# EAGLE board BNC Shield 0.1-0.8 SMD (EAGLE 6.4)
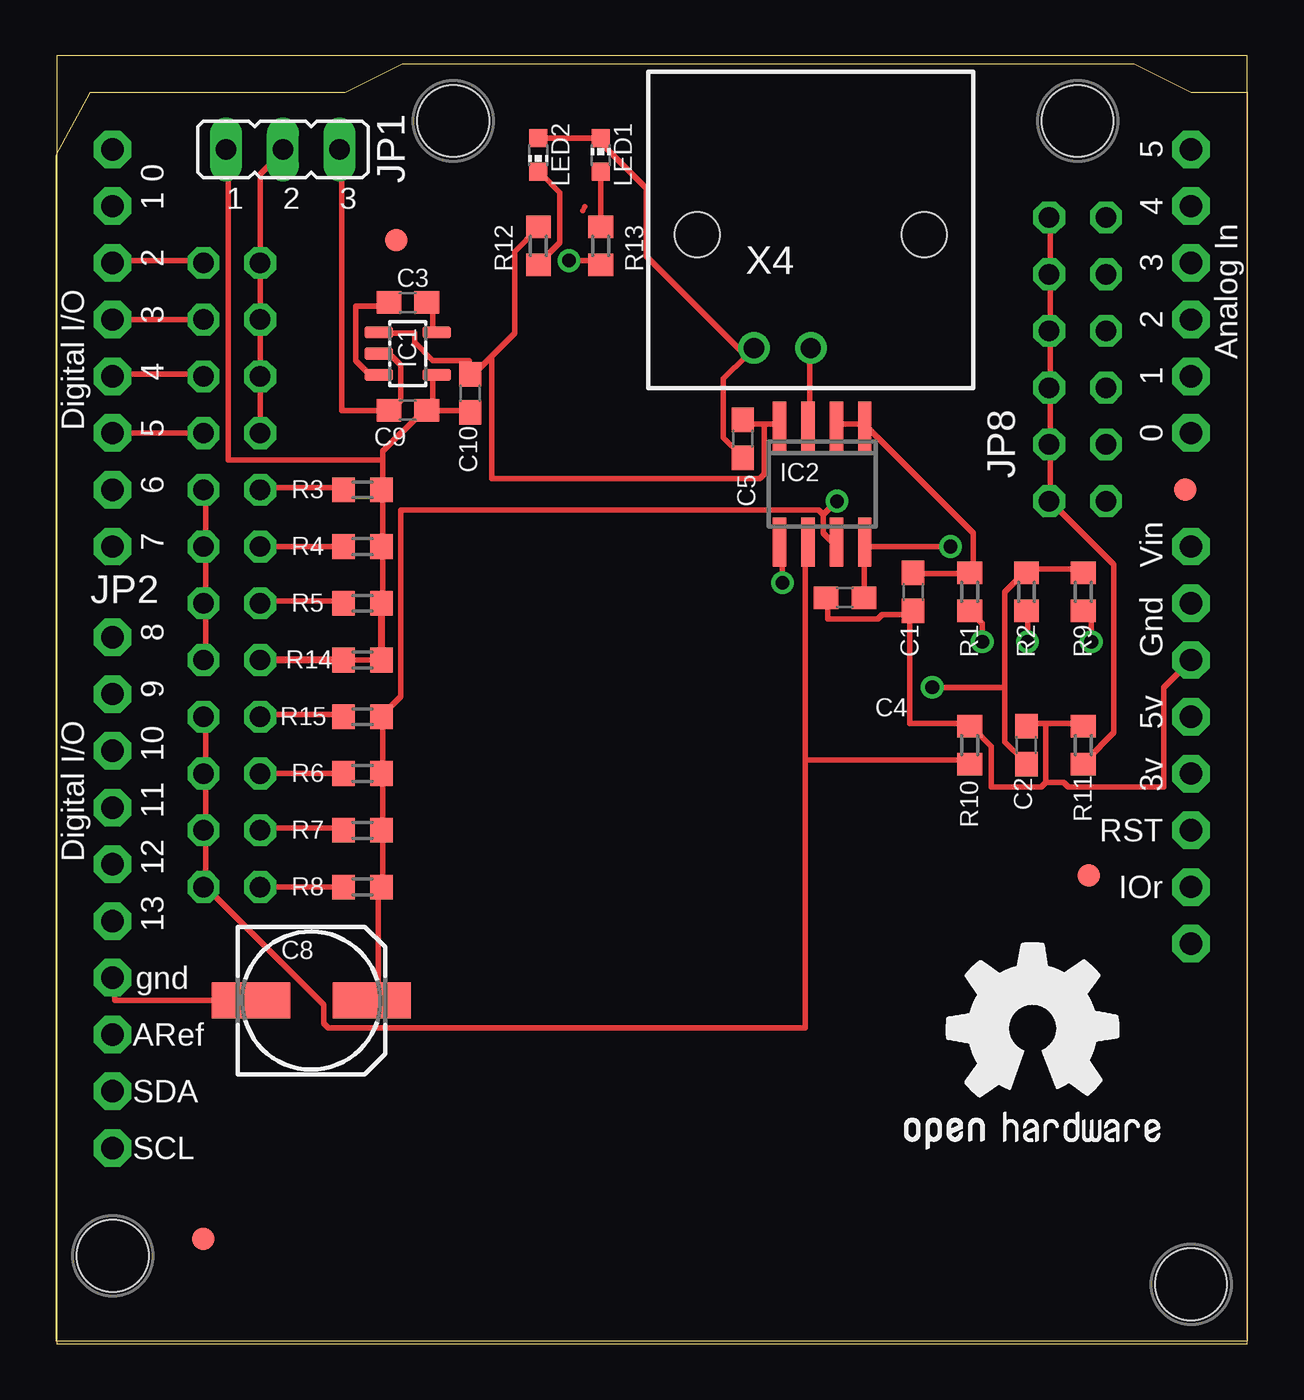
[diagram p0: board, top side]
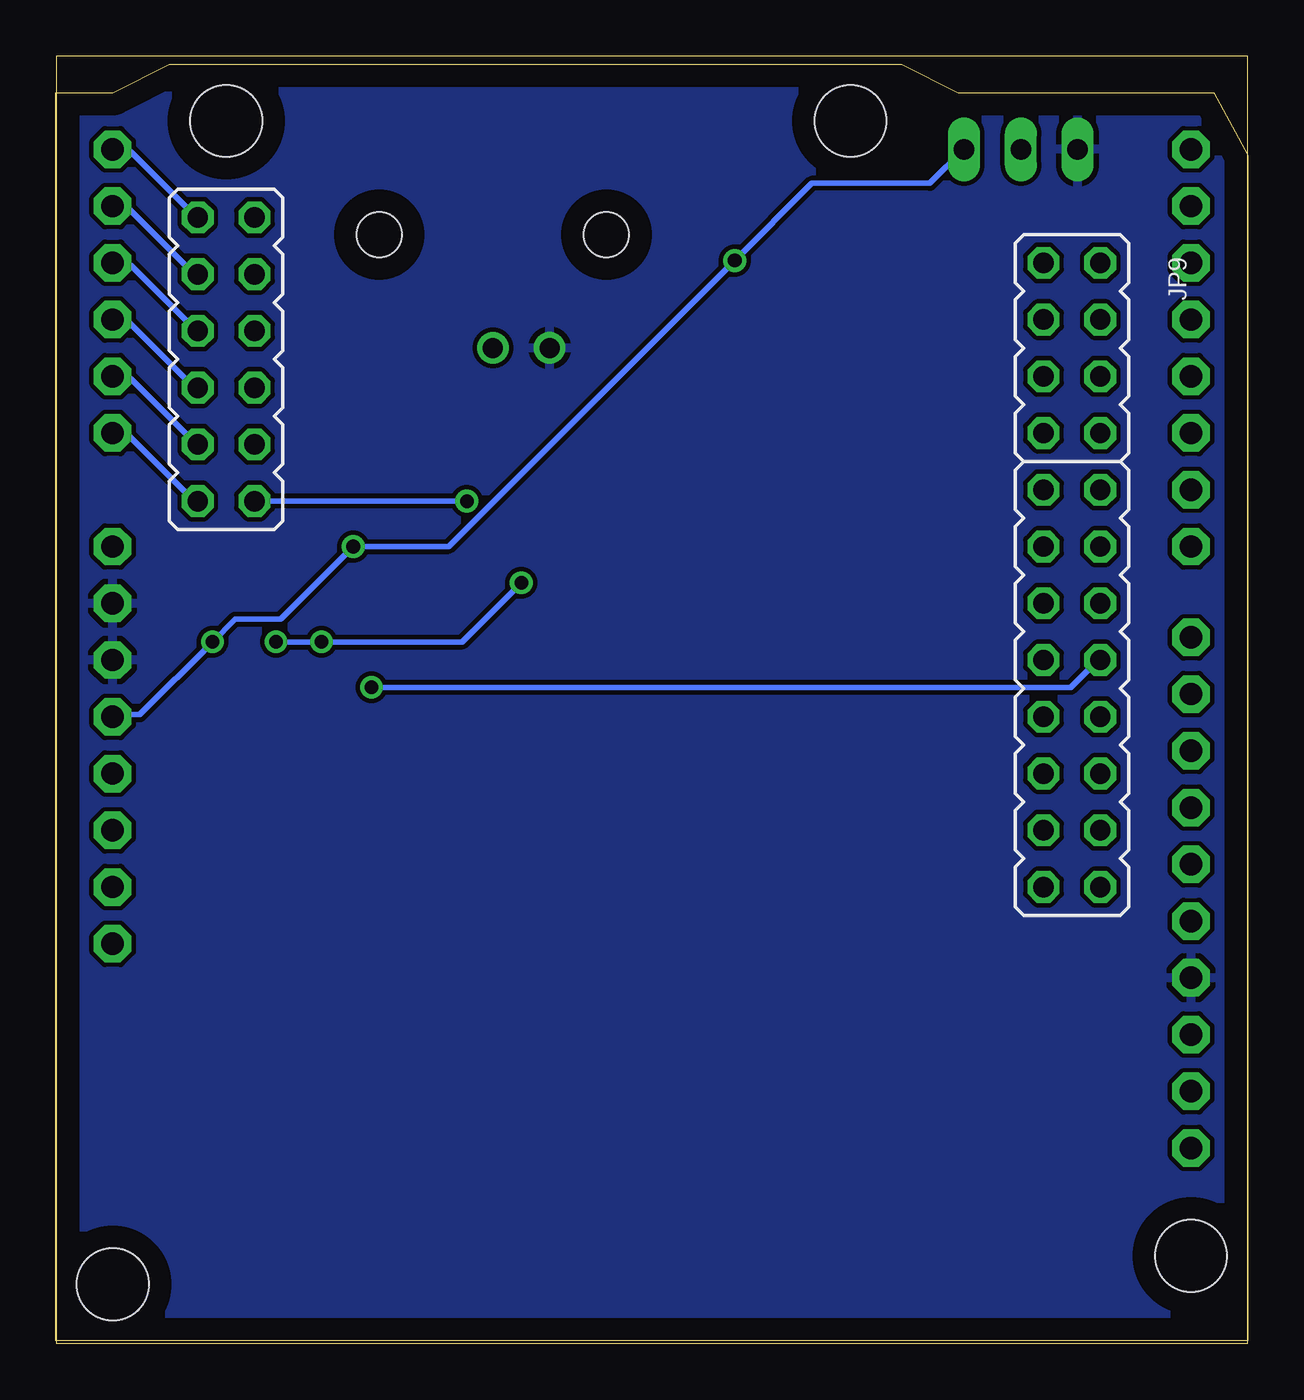
[diagram p1: board, bottom side, seen from below]

Size 53.34 x 57.65 mm. Coordinates in mm from the lower left corner, seen from the top.
Outline: 0.04,0 53.3,0 53.3,57.65 0.04,57.65 0.04,0
Copper layers (1*16): Top 0.035mm / dielectric 1.5mm / Bottom 0.035mm
Design rules "default": minimum track width 10mil, minimum drill 24mil, track to track 8mil, track to pad 8mil, pad to pad 8mil, via to via 8mil, smd to smd 8mil, copper to edge 40mil, drill to drill 8mil, minimum pad ring 10mil, minimum via ring 8mil, stop-mask expansion 4mil, vias tented up to drill 0mil, thermal gap 10mil
Holes 3.2 mm at 45.72,54.73 17.78,54.73 2.54,3.93 50.8,2.66

## Footprints (pad centres in the part's own frame; a part is rotated, then mirrored left to right if it is on the bottom)
C0603 = smd 1.1 x 1: 1 -0.85,0; 2 0.85,0
C603 = smd 1.1 x 1: 1 -0.85,0; 2 0.85,0
153CLV-0605 = smd 3.5 x 1.6: + 2.7,0; - -2.7,0
SOT23-DBV = smd 0.55 x 1.27: 1 -0.95,-1.3; 2 0,-1.3; 3 0.95,-1.3; 4 0.95,1.3; 5 -0.95,1.3
SO08 = smd 0.6 x 2.2: 1 -1.905,-2.6; 2 -0.635,-2.6; 3 0.635,-2.6; 4 1.905,-2.6; 5 1.905,2.6; 6 0.635,2.6; 7 -0.635,2.6; 8 -1.905,2.6
JP2 = drill 0.914 long: 1 -2.54,0; 2 0,0; 3 2.54,0
JP8Q = drill 0.914 octagon: 1 -8.89,-1.27; 2 -8.89,1.27; 3 -6.35,-1.27; 4 -6.35,1.27; 5 -3.81,-1.27; 6 -3.81,1.27; 7 -1.27,-1.27; 8 -1.27,1.27; 9 1.27,-1.27; 10 1.27,1.27; 11 3.81,-1.27; 12 3.81,1.27; 13 6.35,-1.27; 14 6.35,1.27; 15 8.89,-1.27; 16 8.89,1.27
JP6Q = drill 0.914 octagon: 1 -6.35,-1.27; 2 -6.35,1.27; 3 -3.81,-1.27; 4 -3.81,1.27; 5 -1.27,-1.27; 6 -1.27,1.27; 7 1.27,-1.27; 8 1.27,1.27; 9 3.81,-1.27; 10 3.81,1.27; 11 6.35,-1.27; 12 6.35,1.27
JP4Q = drill 0.914 octagon: 1 -3.81,-1.27; 2 -3.81,1.27; 3 -1.27,-1.27; 4 -1.27,1.27; 5 1.27,-1.27; 6 1.27,1.27; 7 3.81,-1.27; 8 3.81,1.27
CHIP-LED0603 = smd 0.8 x 0.8: A 0,-0.75; C 0,0.75
R0603 = smd 1 x 1.1: 1 -0.85,0; 2 0.85,0
ARDUINOR3 = drill 1 pad 1.676 octagon: 3V 25.4,2.54; 5V 27.94,2.54; A0 40.64,2.54; A1 43.18,2.54; A2 45.72,2.54; A3 48.26,2.54; A4 50.8,2.54; A5 53.34,2.54; AREF 13.716,50.8; D0 53.34,50.8; D1 50.8,50.8; D2 48.26,50.8; D3 45.72,50.8; D4 43.18,50.8; D5 40.64,50.8; D6 38.1,50.8; D7 35.56,50.8; D8 31.496,50.8; D9 28.956,50.8; D10 26.416,50.8; D11 23.876,50.8; D12 21.336,50.8; D13 18.796,50.8; GND 16.256,50.8; GND1 33.02,2.54; GND2 30.48,2.54; IOREF 20.32,2.54; RESERVED 17.78,2.54; RESET 22.86,2.54; SCL 8.636,50.8; SDA 11.176,50.8; VIN 35.56,2.54
FIDUCIAL_1MM = smd 1 x 1: 1 0,0
AMP_227161 = drill 0.9 pad 1.27: 1 0,-5.08; 2 -2.54,-5.08 | hole 2: -5.08,0; 5.08,0

## Placement (x,y rotation side)
C1  10uF  [C0603]  38.35,33.65 270 top
C2  10uF  [C0603]  43.43,26.79 90 top
C3  1u  [C603]  15.75,46.6 0 top
C4  0.1uf  [C603]  35.31,33.4 180 top
C5  0.1uf  [C603]  30.73,40.51 270 top
C8  100ufX6.3v  [153CLV-0605]  11.43,15.36 0 top
C9  1u  [C603]  15.75,41.78 0 top
C10  1u  [C603]  18.54,42.54 90 top
IC1  TPS60400DBV  [SOT23-DBV]  15.75,44.32 270 top
IC2  TL072D  [SO08]  34.29,38.48 180 top
JP1  [JP2]  10.16,53.46 0 top
JP2  [JP8Q]  7.87,29.33 270 bottom
JP8  [JP6Q]  45.72,44.06 90 bottom
JP9  [JP4Q]  7.87,44.57 90 bottom
LED1  [CHIP-LED0603]  24.38,53.21 0 top
LED2  [CHIP-LED0603]  21.59,53.21 180 top
R1  100k  [R0603]  40.89,33.65 270 top
R2  100k  [R0603]  43.43,33.65 270 top
R3  1.91k  [R0603]  13.72,38.22 180 top
R4  909  [R0603]  13.72,35.68 180 top
R5  400  [R0603]  13.72,33.14 180 top
R6  110k  [R0603]  13.72,25.52 180 top
R7  240k  [R0603]  13.72,22.98 180 top
R8  490k  [R0603]  13.72,20.44 180 top
R9  10K  [R0603]  45.97,33.65 90 top
R10  10k  [R0603]  40.89,26.79 270 top
R11  100k  [R0603]  45.97,26.79 270 top
R12  150  [R0603]  21.59,49.14 90 top
R13  150  [R0603]  24.38,49.14 90 top
R14  205  [R0603]  13.72,30.6 180 top
R15  51k  [R0603]  13.72,28.06 180 top
U1  ARDUINOR3-DIMENSION  [ARDUINOR3]  53.34,0.12 90 top
U$1  [OSHW1]  37.34,6.98 0 top
U$2  FIDUCIAL  [FIDUCIAL_1MM]  6.6,4.69 0 top
U$3  FIDUCIAL  [FIDUCIAL_1MM]  46.23,20.95 0 top
U$4  FIDUCIAL  [FIDUCIAL_1MM]  15.24,49.4 0 top
U$5  FIDUCIAL  [FIDUCIAL_1MM]  50.55,38.22 0 top
X4  1-227161-0  [AMP_227161]  33.78,49.65 0 top

## Library data of the parts
C1 C2 R1-R15 = resistor
C3-C5 C9 C10 = dp_devices
C8 LED1 LED2 U1 U$2-U$5 = adafruit
IC1 = SparkysWidgets
IC2 = linear
JP1 JP2 JP8 JP9 = jumper
U$1 = NBitWonder
X4 = con-coax

## Nets
3V: U1.3V
-5V: C5.1 C10.2 IC1.1 IC2.4 R12.2
GND: C1.2 C2.2 C4.2 C5.2 C8.- C9.2 C10.1 IC1.4 JP1.1 LED1.C LED2.A R3.1 R4.1 R5.1 R10.1 R11.1 R14.1 U1.GND U1.GND1 U1.GND2 X4.2
N$1: C1.1 IC2.1 IC2.2 R1.1
N$2: JP2.1 R3.2
N$3: JP2.3 R4.2
N$4: JP2.5 R5.2
N$5: IC2.5 R1.2 R2.2
N$6: C2.1 JP2.2 JP2.4 JP2.6 JP2.8 R2.1 R9.2
N$7: JP2.11 R6.2
N$8: JP2.13 R7.2
N$9: JP2.15 R8.2
N$10: JP9.1 U1.D5
N$11: IC2.6 JP2.10 JP2.12 JP2.14 JP2.16 R10.2
N$12: IC2.3 X4.1
N$13: JP8.2 U1.A0
N$14: JP8.4 U1.A1
N$15: JP8.6 U1.A2
N$16: JP8.8 U1.A3
N$17: JP9.3 U1.D4
N$18: LED2.C R12.1
N$19: LED1.A R13.2
N$21: JP8.10 U1.A4
N$22: C3.1 IC1.3
N$23: C3.2 IC1.5
N$24: JP9.5 U1.D3
N$25: JP9.7 U1.D2
N$26: JP8.12 U1.A5
N$27: JP2.7 R14.2
N$28: JP2.9 R15.2
ONEWIRE_DATA: JP1.2 JP9.2 JP9.4 JP9.6 JP9.8
TO_ARDUINO: C8.+ IC2.7 JP8.1 JP8.3 JP8.5 JP8.7 JP8.9 JP8.11 R6.1 R7.1 R8.1 R11.2 R15.1
VCC: C4.1 C9.1 IC1.2 IC2.8 JP1.3 R9.1 R13.1 U1.5V
VIN: U1.VIN

## Tracks (layer width: path | path; a pad name or v marks a point on that pad's centre or on a via)
-5V
  Top 0.254: 31.7,41.17 32.31,41.17 IC2.4 | 31.7,41.17 30.89,41.17 C5.1 | 19.51,44.22 20.52,45.23 20.52,48.89 21.54,49.91 R12.2 | 19.51,44.22 18.69,43.4 C10.2 18.49,43.4 18.49,44.01 16.87,44.01 16.05,44.83 16.05,45.23 14.63,45.23 IC1.1 | 31.7,41.17 31.7,38.93 31.5,38.73 19.51,38.73 19.51,44.22
GND
  Top 0.254: 44.3,27.76 45.92,27.76 R11.1 | 44.3,27.76 43.48,27.76 C2.2 | 38.2,32.63 36.98,32.63 36.78,32.43 34.54,32.43 34.54,33.24 C4.2 | 38.2,32.63 38.2,27.76 40.84,27.76 R10.1 41.05,27.55 41.86,26.74 41.86,24.91 44.09,24.91 44.3,25.12 | 38.2,32.63 C1.2 | 44.3,25.12 44.3,27.76 | 16.66,41.78 16.87,41.98 16.87,43.2 IC1.4 | 16.66,41.78 18.49,41.78 C10.1 | 16.66,41.78 C9.2 16.46,41.78 14.63,39.95 14.63,39.54 | 14.63,35.68 14.63,38.12 R3.1 14.63,38.32 14.63,39.54 | 13.01,30.6 R14.1 | 14.43,33.04 R5.1 14.63,33.24 14.63,35.68 | 14.63,35.68 R4.1 | LED2.A 21.74,53.97 LED1.C 24.38,53.77 26.42,51.73 26.42,48.69 30.89,44.22 | 30.89,44.22 X4.2 31.09,44.42 | 30.89,44.22 29.87,43.2 29.87,40.56 30.68,39.75 C5.2 | C8.- 2.64,15.36 2.64,16.38 U1.GND | 14.63,39.54 7.72,39.54 7.72,53.36 JP1.1 | 44.3,25.12 45.11,25.12 45.31,24.91 49.58,24.91 49.58,29.38 U1.GND2
  Top 0.305: 14.57,33.04 R14.1
  Top 0.406: 14.43,33.04 14.57,33.04
  pour Bottom: -2.29,59.05 55.12,59.05 55.12,-1.91 -3.3,-1.91 -3.3,57.27 -3.3,59.05 -2.54,59.05
N$1
  Top 0.254: C1.1 38.41,34.46 40.84,34.46 R1.1 41.05,34.67 41.05,36.29 36.37,40.97 IC2.1 36.17,41.17 34.95,41.17 IC2.2
N$2
  Top 0.254: R3.2 12.8,38.32 9.14,38.32 JP2.1
N$3
  Top 0.254: JP2.3 R4.2
N$4
  Top 0.254: R5.2 12.8,33.24 9.14,33.24 JP2.5
N$5  (via drill 0.61)
  Top 0.254: v41.45,31.41 41.45,32.23 41.05,32.63 R1.2 | v43.48,31.41 43.48,32.63 R2.2 | v32.51,34.06 32.51,35.68 IC2.5
  Bottom 0.254: v43.48,31.41 v41.45,31.41 35.15,31.41 v32.51,34.06
N$6  (via drill 0.61)
  Top 0.254: 42.47,29.38 42.47,33.65 43.28,34.46 R2.1 43.48,34.67 45.92,34.67 R9.2 | 42.47,29.38 42.47,26.94 43.28,26.13 C2.1 | JP2.8 6.71,30.6 6.71,33.04 JP2.6 6.71,33.24 6.71,35.68 | 6.71,35.68 6.71,38.12 JP2.2 | 6.71,35.68 JP2.4 | v39.22,29.38 42.47,29.38
  Bottom 0.254: v39.22,29.38 7.92,29.38 6.71,30.6 JP2.8
N$7
  Top 0.254: JP2.11 R6.2
N$8
  Top 0.254: R7.2 12.8,23.08 9.14,23.08 JP2.13
N$9
  Top 0.254: JP2.15 R8.2
N$10
  Top 0.254: U1.D5 JP9.1
N$11
  Top 0.254: 6.71,20.44 6.71,22.88 JP2.14 6.71,23.08 6.71,25.52 | 6.71,25.52 6.71,27.96 JP2.10 | 6.71,25.52 JP2.12 | 33.53,26.13 40.84,26.13 R10.2 | 33.53,26.13 33.53,35.68 IC2.6 | 6.71,20.44 11.99,15.16 11.99,14.35 12.19,14.14 33.53,14.14 33.53,26.13 | 6.71,20.44 JP2.16
N$12
  Top 0.254: IC2.3 33.73,41.17 33.73,44.42 X4.1
N$13
  Bottom 0.254: U1.A0 50.19,40.76 47.14,37.71 JP8.2
N$14
  Bottom 0.254: JP8.4 47.14,40.36 49.99,43.2 50.8,43.2 U1.A1
N$15
  Bottom 0.254: U1.A2 50.19,45.84 47.14,42.79 JP8.6
N$16
  Bottom 0.254: JP8.8 47.14,45.44 49.99,48.28 50.8,48.28 U1.A3
N$17
  Top 0.254: JP9.3 6.5,43.4 2.64,43.4 U1.D4
N$18
  Top 0.254: LED2.C 21.74,52.34 22.55,51.53 22.55,49.3 21.74,48.48 R12.1
N$19
  Top 0.254: R13.2 LED1.A
N$20
  Top 0.254: 23.57,50.72 23.67,50.9
N$21
  Bottom 0.254: U1.A4 50.19,50.92 47.14,47.87 JP8.10
N$22
  Top 0.254: C3.1 14.83,46.45 13.41,46.45 13.41,44.01 14.02,43.4 14.43,43.4 IC1.3
N$23
  Top 0.254: C3.2 16.66,46.45 16.87,46.25 16.87,45.44 IC1.5
N$24
  Top 0.254: U1.D3 JP9.5
N$25
  Top 0.254: JP9.7 6.5,48.48 2.64,48.48 U1.D2
N$26
  Bottom 0.254: JP8.12 47.14,50.52 49.99,53.36 50.8,53.36 U1.A5
N$27
  Top 0.254: 14.43,30.6 R14.2
  Top 0.305: R14.2 JP2.7
N$28
  Top 0.254: R15.2 12.8,28.16 9.14,28.16 JP2.9
ONEWIRE_DATA
  Top 0.254: JP9.2 JP9.4 JP9.6 JP9.8 9.14,52.34 10.16,53.36 JP1.2
TO_ARDUINO  (via drill 0.61)
  Top 0.254: 44.5,47.87 44.5,45.44 JP8.7 44.5,45.23 44.5,42.79 | 44.5,47.87 44.5,50.31 JP8.11 | 44.5,47.87 JP8.9 | 44.5,42.79 44.5,40.36 JP8.3 44.5,40.15 44.5,37.71 | 44.5,37.71 47.35,34.87 47.35,27.35 46.13,26.13 R11.2 | 44.5,37.71 JP8.1 | 44.5,42.79 JP8.5 | 14.63,25.52 14.63,27.96 R15.1 14.63,28.16 15.44,28.98 15.44,37.31 34.14,37.31 34.34,37.1 | 14.63,25.52 14.63,23.08 R7.1 14.63,22.88 14.63,20.44 R8.1 14.43,20.44 14.43,15.56 14.22,15.36 C8.+ | 14.63,25.52 R6.1 | 34.34,37.1 34.34,36.29 34.75,35.88 IC2.7 | 34.34,37.1 v34.95,37.71
  Bottom 0.254: v34.95,37.71 JP8.1
VCC  (via drill 0.61)
  Top 0.254: IC1.2 14.63,44.22 15.04,44.22 15.44,43.81 15.44,42.18 15.04,41.78 C9.1 12.8,41.78 12.8,53.36 JP1.3 | v22.96,48.48 24.38,48.48 R13.1 | C4.1 36.17,33.45 36.17,35.68 IC2.8 36.37,35.68 v40.03,35.68 | v46.33,31.41 46.33,32.43 46.13,32.63 R9.1
  Bottom 0.254: JP1.3 14.22,51.94 19.51,51.94 v22.96,48.48 35.76,35.68 v40.03,35.68 43.28,32.43 45.31,32.43 v46.33,31.41 49.58,28.16 50.8,28.16 U1.5V

## Text on the board
tValues: G | D | V | 1.91k + 51k = 0.8 | 909 + 110k = 0.414 | 400 + 240k = 0.2 | 205 + 490k = 0.1 | practicalmaker.com | v1.1